# Altium PCB jfino-anchor.PcbDoc
Units mm, origin at the board's own origin, x right, y up, seen from the top; angles counter-clockwise.
Board outline 32.5 x 65.3 mm, 2 copper layers (Top Layer, Bottom Layer), stack 1.57 mm thick; 90 components, 72 nets, 274 pads, 173 vias.
Unrouted connection lines stored in the file: 100.
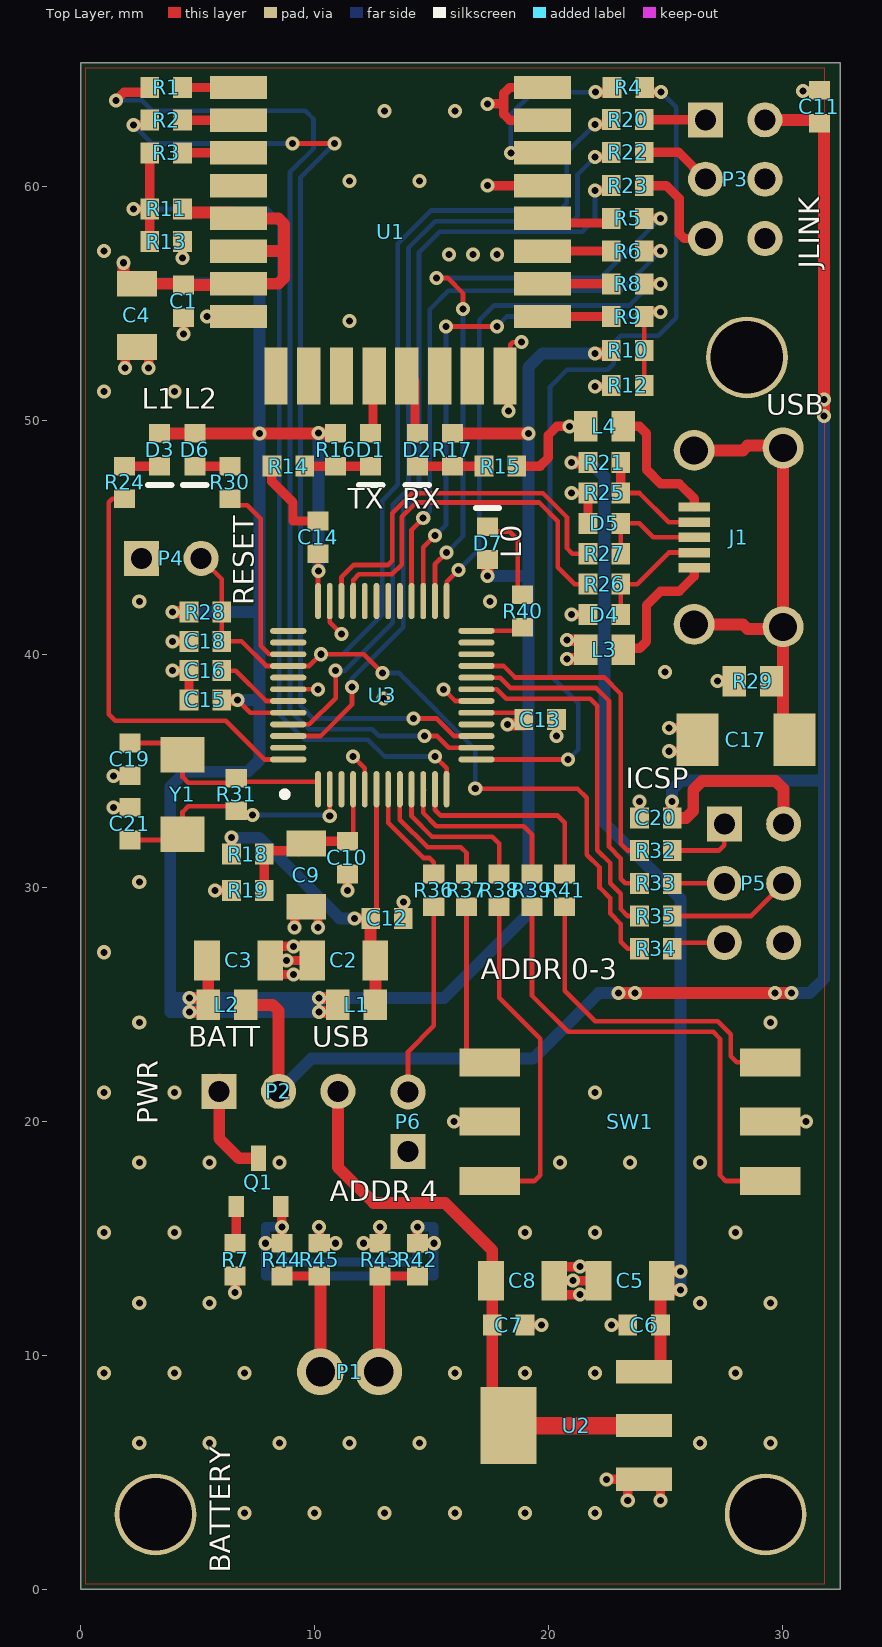
[diagram p0: Top Layer view]
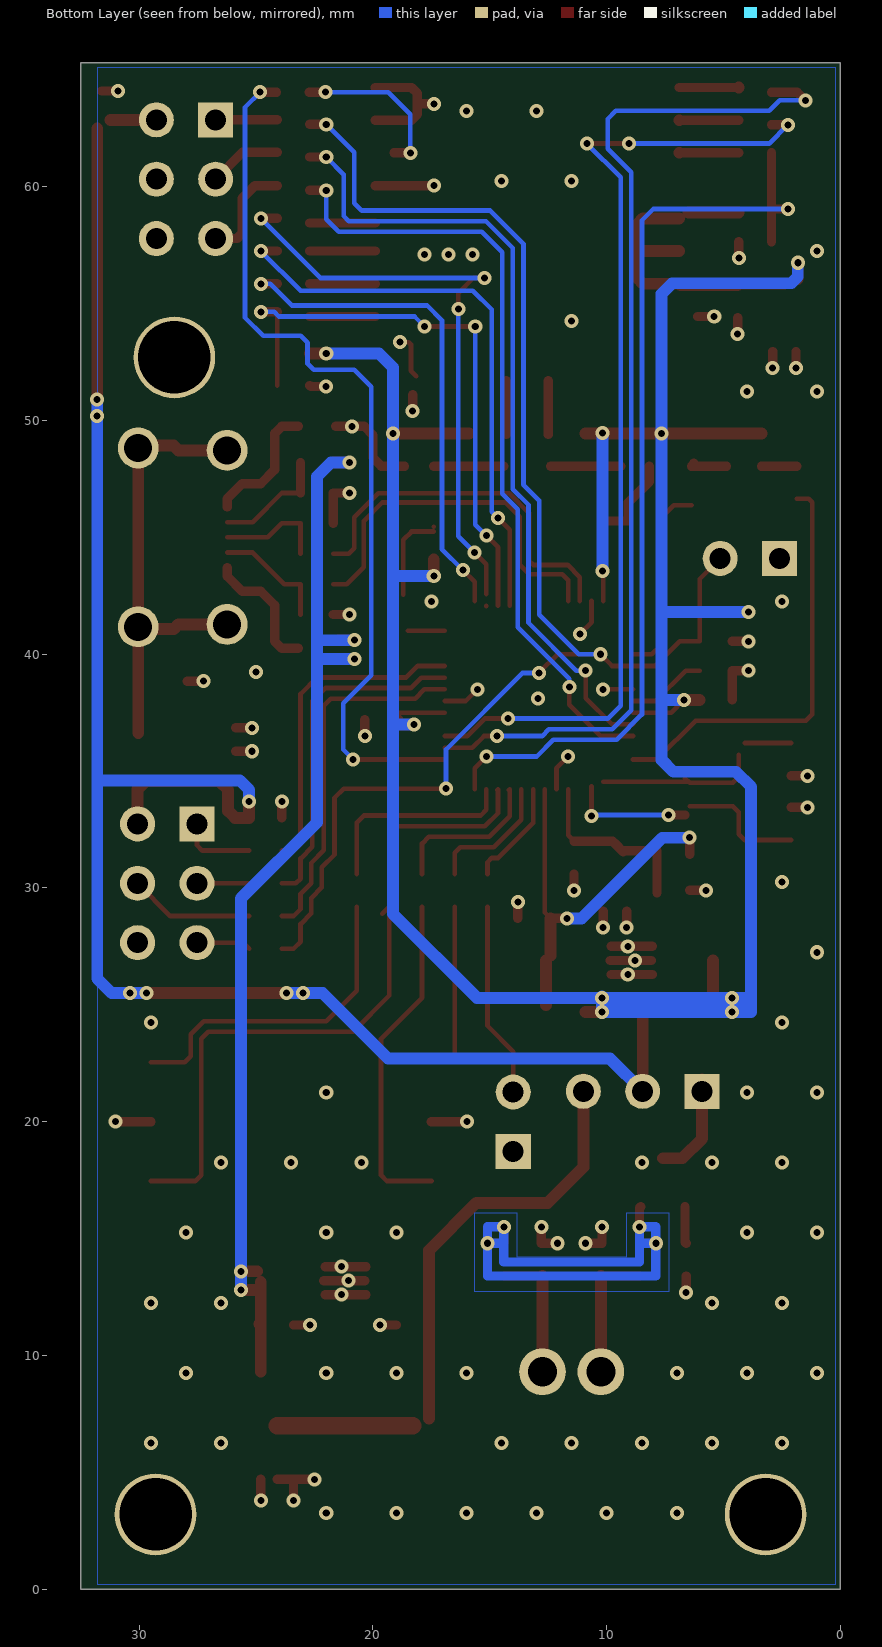
[diagram p1: Bottom Layer view, seen from below]
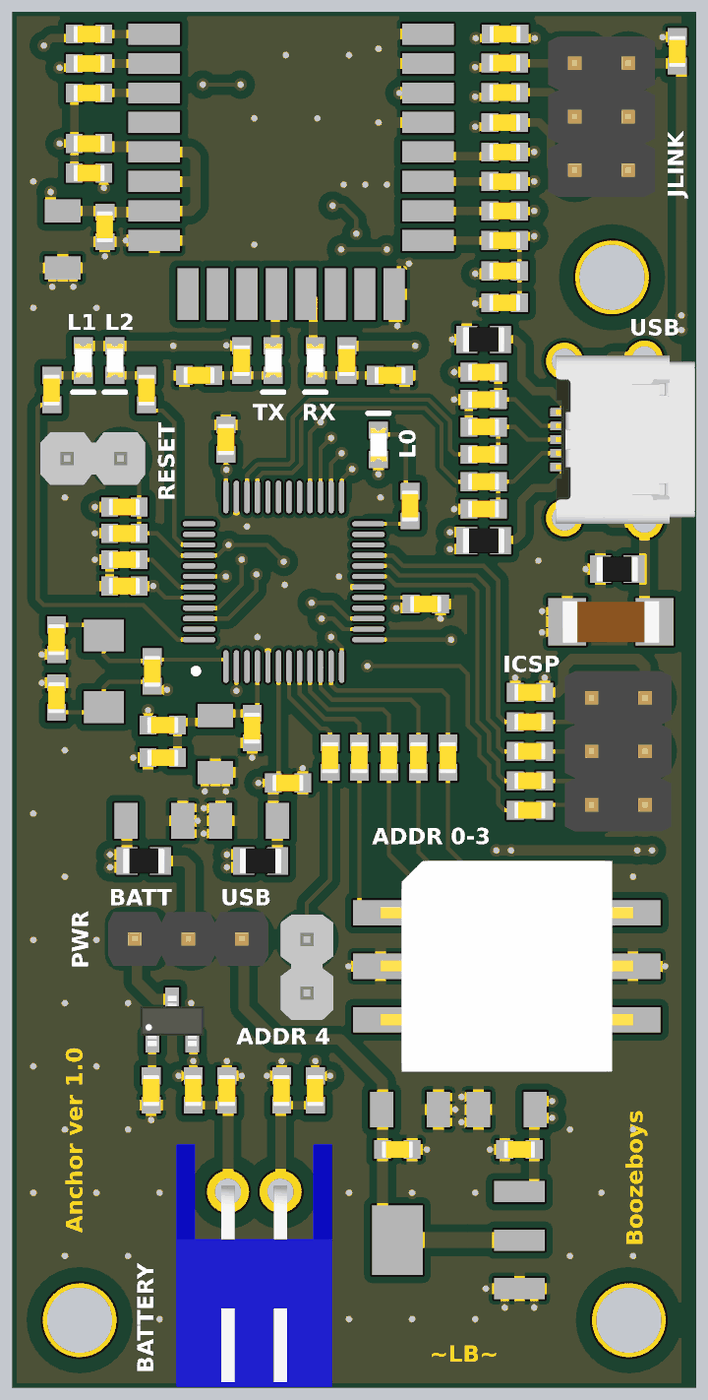
[diagram p2: 3D render of the assembled board from above, using the file's embedded part models]

## Layer stack, top to bottom
Top Solder: solder mask 0.01, Dk 0
Top Layer: signal copper 0.035
Core: core 1.5, Dk 0
Bottom Layer: signal copper 0.035
Bottom Solder: solder mask 0.01, Dk 0

## Board outline
0,65.3 32.5,65.3 32.5,0 0,0

## Design rules (kind name [scope] priority, off if disabled: settings)
Clearance Clearance_U3 [(ObjectKind = 'Pad') And (Component = 'U3')] p1: gap=0.24 ignorepadtopadclearanceinfootprint=FALSE
Clearance Clearance_J1 [(ObjectKind = 'Pad') And (Component = 'J1')] p2: gap=0.23 ignorepadtopadclearanceinfootprint=FALSE
Clearance Clearance_DIFF [InNetClass('USB')] p3: gap=0.2 ignorepadtopadclearanceinfootprint=FALSE
Clearance [All] p4: gap=0.254 ignorepadtopadclearanceinfootprint=FALSE except(0.381: Arc-Fill Arc-Poly Arc-Region Track-Fill Track-Poly Track-Region SMDPad-Fill SMDPad-Poly SMDPad-Region Via-Fill Via-Poly Via-Region Fill-Fill Fill-Poly Fill-Region Poly-Poly Poly-Region Region-Region; 0.762: THPad-Fill THPad-Poly THPad-Region)
DiffPairsRouting [InDifferentialPairClass('All Differential Pairs')] p1: maxlimit=0.2 minlimit=0.2 mostfreqgap=0.2 toplayer_minwidth=0.2 toplayer_maxwidth=0.2 toplayer_prefwidth=0.2 bottomlayer_minwidth=0.2 bottomlayer_maxwidth=0.2 bottomlayer_prefwidth=0.2 maxuncoupledlength=12.7
HoleSize [All] p1: absolutevalues=TRUE maxlimit=3.5 minlimit=0.025 maxpercent=80.000 minpercent=20.000
MatchedLengths MatchedLengths_usb1 [InDifferentialPair('usb1')] p1: tolerance=0.5 checknetsindiffpair=TRUE checkdiffpairvsdiffpair=FALSE checkxsignals=FALSE checkothers=FALSE
MatchedLengths MatchedLengths_usb2 [InDifferentialPair('usb2')] p2: tolerance=0.5 checknetsindiffpair=TRUE checkdiffpairvsdiffpair=FALSE checkxsignals=FALSE checkothers=FALSE
MinimumSolderMaskSliver [All] p1: minsoldermaskwidth=0.04
PolygonConnect PolygonConnect_via [IsVia] p1: connectstyle=Direct reliefconductorwidth=0.254 reliefentries=4 polygonreliefangle="90 Angle" airgapwidth=0.254
PolygonConnect [All] p2: connectstyle=Relief reliefconductorwidth=0.508 reliefentries=4 polygonreliefangle="90 Angle" airgapwidth=0.254
RoomDefinition jfino-anchor [InComponentClass('jfino-anchor')] p1: confinementstyle=ConfineIn formatcopy=TRUE lockcomponents=FALSE outline 101.25,-33.25 576.499,-33.25 576.499,-5.75 101.25,-5.75
RoutingVias [All] p1: holewidth=0.3 width=0.6 viastyle="Through Hole" minholewidth=0.3 minwidth=0.6 maxholewidth=0.3 maxwidth=0.6
SolderMaskExpansion [All] p1: expansion=0.102
Width [All] p1: maxlimit=1 minlimit=0.2 preferedwidth=0.508
27 further rules are at their usual default settings.

## Classes and differential pairs
net class USB: usb1_n usb1_p usb2_n usb2_p
differential pair usb1: +usb1_p -usb1_n
differential pair usb2: +usb2_p -usb2_n

## Components (designator, comment, footprint, x,y, rotation, side; value= is the part's Value field where it differs from the comment)
C1 "100nF" 0603_[1608] 4.4,55.1 r90 top value=10nF
C2 "10uF" 1206_[3216] 11.25,26.9 r0 top value=10nF
C3 "10uF" 1206_[3216] 6.75,26.9 r180 top value=10nF
C4 "10uF" 1206_[3216] 2.4,54.5 r90 top value=10nF
C5 "47uF" 1206_[3216] 23.5,13.2 r0 top value=10nF
C6 "100nF" 0603_[1608] 24.1,11.3 r0 top value=10nF
C7 "100nF" 0603_[1608] 18.3,11.3 r180 top value=10nF
C8 "47uF" 1206_[3216] 18.9,13.2 r180 top value=10nF
C9 "10uF" 1206_[3216] 9.65,30.55 r90 top value=10nF
C10 "100nF" 0603_[1608] 11.4,31.3 r90 top value=10nF
C11 "100nF" 0603_[1608] 31.6,63.425 r90 top value=10nF
C12 "100nF" 0603_[1608] 13.1,28.7 r180 top value=10nF
C13 "100nF" 0603_[1608] 19.65,37.2 r180 top value=10nF
C14 "100nF" 0603_[1608] 10.15,45 r270 top value=10nF
C15 "100nF" 0603_[1608] 5.325,38.05 r0 top value=10nF
C16 "100nF" 0603_[1608] 5.325,39.3 r0 top value=10nF
C17 "NP" 1808_[4520] 28.45,36.35 r0 top value=10nF
C18 "100nF" 0603_[1608] 5.325,40.55 r0 top value=10nF
C19 "6.8pF" 0603_[1608] 2.1,35.5 r270 top value=10nF
C20 "100nF" 0603_[1608] 24.6,33 r180 top value=10nF
C21 "6.8pF" 0603_[1608] 2.1,32.75 r90 top value=10nF
D1 "WB_TX" 0603_[1608]_K1-A2_LED 12.4,48.75 r270 top
D2 "WB_RX" 0603_[1608]_K1-A2_LED 14.4,48.75 r270 top
D3 "RX_LED" 0603_[1608]_K1-A2_LED 3.375,48.75 r270 top
D4 "CG0603MLC-05" 0603_[1608] 22.4,41.7 r180 top
D5 "CG0603MLC-05" 0603_[1608] 22.4,45.6 r180 top
D6 "TX_LED" 0603_[1608]_K1-A2_LED 4.875,48.75 r270 top
D7 "CPU_LED" 0603_[1608]_K1-A2_LED 17.4,44.75 r90 top
J1 "Mini USB Type B" USB_MICRO_B_SMD 28.75,45 r90 top
L1 "Inductor" 0805_[2012] 11.8,25 r180 top
L2 "Inductor" 0805_[2012] 6.25,25 r0 top
L3 "WE742792022" 0805_[2012] 22.4,40.2 r180 top
L4 "WE742792022" 0805_[2012] 22.4,49.75 r0 top
P1 "BATT_CONN" BATTERY_CONNECTOR_LIPO_THD 11.5,5.8 r0 top
P2 "BATT/USB" HEADER_1X3_2.54MM_THD 8.46,21.3 r0 top
P3 "JLINK" HEADER_2X3_2.54MM_THD 28,60.325 r270 top
P4 "RESET" HEADER_1X2_2.54MM_THD 3.875,44.1 r0 top
P5 "ICSP" HEADER_2X3_2.54MM_THD 28.8,30.2 r270 top
P6 "ADDR_H" HEADER_1X2_2.54MM_THD 14,20 r90 top
Q1 "IRLML6402" SOT-23 7.6,17.4 r90 top
R1 "33R" 0603_[1608] 3.65,64.25 r0 top value=1K
R2 "33R" 0603_[1608] 3.65,62.85 r0 top value=1K
R3 "33R" 0603_[1608] 3.65,61.45 r0 top value=1K
R4 "33R" 0603_[1608] 23.425,64.25 r0 top value=1K
R5 "33R" 0603_[1608] 23.4,58.65 r0 top value=1K
R6 "33R" 0603_[1608] 23.4,57.25 r0 top value=1K
R7 "1k" 0603_[1608] 6.6,14.1 r270 top value=1K
R8 "33R" 0603_[1608] 23.4,55.85 r0 top value=1K
R9 "33R" 0603_[1608] 23.4,54.45 r0 top value=1K
R10 "47k" 0603_[1608] 23.4,53 r180 top value=1K
R11 "NP" 0603_[1608] 3.65,59.05 r0 top value=1K
R12 "NP" 0603_[1608] 23.4,51.5 r180 top value=1K
R13 "47k" 0603_[1608] 3.65,57.65 r0 top value=1K
R14 "1k" 0603_[1608] 8.875,48.05 r0 top value=1K
R15 "1k" 0603_[1608] 17.95,48.05 r180 top value=1K
R16 "NP" 0603_[1608] 10.9,48.75 r270 top value=1K
R17 "NP" 0603_[1608] 15.9,48.75 r270 top value=1K
R18 "NP" 0603_[1608] 7.15,31.45 r180 top value=1K
R19 "NP" 0603_[1608] 7.15,29.9 r0 top value=1K
R20 "33R" 0603_[1608] 23.4,62.875 r0 top value=1K
R21 "NP" 0603_[1608] 22.4,48.2 r180 top value=1K
R22 "33R" 0603_[1608] 23.4,61.475 r0 top value=1K
R23 "33R" 0603_[1608] 23.4,60.05 r0 top value=1K
R24 "470R" 0603_[1608] 1.875,47.35 r90 top value=1K
R25 "NP" 0603_[1608] 22.4,46.9 r0 top value=1K
R26 "33R" 0603_[1608] 22.4,43 r180 top value=1K
R27 "33R" 0603_[1608] 22.4,44.3 r180 top value=1K
R28 "47k" 0603_[1608] 5.325,41.8 r180 top value=1K
R29 "NP" 0805_[2012] 28.75,38.85 r180 top value=1K
R30 "470R" 0603_[1608] 6.375,47.35 r90 top value=1K
R31 "NP" 0603_[1608] 6.65,34 r270 top value=1K
R32 "33R" 0603_[1608] 24.6,31.6 r0 top value=1K
R33 "33R" 0603_[1608] 24.6,30.2 r0 top value=1K
R34 "33R" 0603_[1608] 24.6,27.4 r0 top value=1K
R35 "33R" 0603_[1608] 24.6,28.8 r180 top value=1K
R36 "33R" 0603_[1608] 15.1,29.9 r90 top value=1K
R37 "33R" 0603_[1608] 16.5,29.9 r90 top value=1K
R38 "33R" 0603_[1608] 17.9,29.9 r90 top value=1K
R39 "33R" 0603_[1608] 19.3,29.9 r90 top value=1K
R40 "470R" 0603_[1608] 18.9,41.85 r90 top value=1K
R41 "33R" 0603_[1608] 20.7,29.9 r90 top value=1K
R42 "NP" 0603_[1608] 14.4,14.1 r90 top value=1K
R43 "NP" 0603_[1608] 12.8,14.1 r90 top value=1K
R44 "NP" 0603_[1608] 8.6,14.1 r90 top value=1K
R45 "NP" 0603_[1608] 10.2,14.1 r90 top value=1K
SW1 "ADDRESS_SW" rotary_switch 23.5,20 r270 top
U1 "DW1000" DWM1000 6.75,51.9 r0 top
U2 "LM1117-3V3" SOT-223 21.2,7 r180 top
U3 "SAMD21G" LQFP-48_7x7MM_0.5MM 12.9,38.25 r90 top
Y1 "32.768kHz-SMD" CRYSTAL_4X1.5MM_2P_SMD 4.35,34 r90 top

## Footprints (in the part's own frame and the unit in brackets; to place one, negate y for a bottom-side part, rotate by r counter-clockwise, add the part's x,y. Pads: shape width x height; smd on the part's side, far side on the other; paste and mask are expansions set on the pad)
0603_[1608] [mm] "Chip Capacitor, Body 1.6x0.8mm, IPC High Density"
  rect 0.8x0.9 smd: 1(-0.7,0) 2(0.7,0)
  body extent -0.75,-0.4 0.75,0.4, height 0.67
0603_[1608]_K1-A2_LED [mm] "SMD led 0603 size"
  rect 0.8x0.9 smd: 1(0.7,0) 2(-0.7,0)
  silkscreen extent 1.5,-0.5 1.5,0.5, body extent -0.8,-0.4 0.8,0.4, height 0.7
0805_[2012] [mm] "Chip Resistor, Body 2.0x1.2mm, IPC High Density"
  rect 1x1.3 smd: 1(-0.8,0) 2(0.8,0)
  body extent -1,-0.6 1,0.6, height 0.62
1206_[3216] [mm] "Chip Capacitor, Body 3.2x1.6mm, IPC High Density"
  rect 1.1x1.7 smd: 1(-1.35,0) 2(1.35,0)
  body extent -1.7,-0.9 1.7,0.9, height 1.3
1808_[4520] [mm] "Chip Capacitor; Body 4.5 x 2.0 mm (LxW typ)"
  rect 1.8x2.25 smd: 1(-2.075,0) 2(2.075,0)
  body extent -2.3,-1 2.3,1, height 1.35
BATTERY_CONNECTOR_LIPO_THD [mm]
  round 2 hole 1.25: 1(-1.25,3.5) 2(1.25,3.5)
  body extent -3.7,-5.75 3.7,5.75, height 5.95
CRYSTAL_4X1.5MM_2P_SMD [mm] "smd crystall"
  rect 1.5x1.9 smd: 1(-1.7,0) 2(1.7,0)
  body extent -2.05,-0.75 2.05,0.75, height 1
DWM1000 [mm]
  rect 2.45x1 smd: 1(0,12.35) 2(0,10.95) 3(0,9.55) 4(0,8.15) 5(0,6.75) 6(0,5.35) 7(0,3.95) 8(0,2.55) 17(13,2.55) 18(13,3.95) 19(13,5.35) 20(13,6.75) 21(13,8.15) 22(13,9.55) 23(13,10.95) 24(13,12.35)
  rect 1x2.45 smd: 9(1.6,0) 10(3,0) 11(4.4,0) 12(5.8,0) 13(7.2,0) 14(8.6,0) 15(10,0) 16(11.4,0)
  body extent 0,0 13,23, height 1
HEADER_1X2_2.54MM_THD [mm] "Connector; Header; 2 Position"
  rect 1.5x1.5 hole 0.9: 1(-1.27,0)
  round 1.5 hole 0.9: 2(1.27,0)
  body extent -2.54,-1.25 2.44,1.25, height 8.2
HEADER_1X3_2.54MM_THD [mm] "pin header 2.54mm 1row 3pin"
  rect 1.5x1.5 hole 0.9: 1(-2.54,0)
  round 1.5 hole 0.9: 2(0,0) 3(2.54,0)
  body extent -3.91,-1.27 3.71,1.27, height 8.67
HEADER_2X3_2.54MM_THD [mm] "pin header 2.54mm 2row 6pin"
  rect 1.5x1.5 hole 0.9: 1(-2.54,-1.27)
  round 1.5 hole 0.9: 2(-2.54,1.27) 3(0,-1.27) 4(0,1.27) 5(2.54,-1.27) 6(2.54,1.27)
  body extent -3.81,-2.54 3.81,2.54, height 8.54
LQFP-48_7x7MM_0.5MM [mm] "Thin QFP, 48-Leads, Body 7x7mm, Pitch 0.5mm, IPC High Density"
  oval 1.55x0.25 smd: 1(-4.025,2.75) 2(-4.025,2.25) 3(-4.025,1.75) 4(-4.025,1.25) 5(-4.025,0.75) 6(-4.025,0.25) 7(-4.025,-0.25) 8(-4.025,-0.75) 9(-4.025,-1.25) 10(-4.025,-1.75) 11(-4.025,-2.25) 12(-4.025,-2.75) 25(4.025,-2.75) 26(4.025,-2.25) 27(4.025,-1.75) 28(4.025,-1.25) 29(4.025,-0.75) 30(4.025,-0.25) 31(4.025,0.25) 32(4.025,0.75) 33(4.025,1.25) 34(4.025,1.75) 35(4.025,2.25) 36(4.025,2.75)
  oval 0.25x1.55 smd: 13(-2.75,-4.025) 14(-2.25,-4.025) 15(-1.75,-4.025) 16(-1.25,-4.025) 17(-0.75,-4.025) 18(-0.25,-4.025) 19(0.25,-4.025) 20(0.75,-4.025) 21(1.25,-4.025) 22(1.75,-4.025) 23(2.25,-4.025) 24(2.75,-4.025) 37(2.75,4.025) 38(2.25,4.025) 39(1.75,4.025) 40(1.25,4.025) 41(0.75,4.025) 42(0.25,4.025) 43(-0.25,4.025) 44(-0.75,4.025) 45(-1.25,4.025) 46(-1.75,4.025) 47(-2.25,4.025) 48(-2.75,4.025)
  silkscreen extent -4.36,4.05 -4.12,4.3, body extent -3.5,-3.5 3.5,3.5, height 1.45
rotary_switch [mm] "SMD Rotary Switch 10x10mm 2.54mm"
  rect 1.2x2.6 smd: 1(-2.54,-6) 2(2.54,6) 4(2.54,-6) 8(-2.54,6) C1(0,-6) C2(0,6)
  body extent -5,-6 5,6, height 6.77
SOT-23 [mm] "SOT23, 3-Leads, Body 2.9x1.3mm, Pitch 0.95mm, Lead Span 2.5mm, IPC High Density"
  rect 0.9x0.65 smd: 1(-1.038,0.95) 2(-1.038,-0.95)
  rect 1.1x0.65 smd: 3(1.038,0)
  body extent -1.2,-1.52 1.2,1.52, height 1.22
SOT-223 [mm] "SOT223, 4-Leads, Body 6.5x3.5mm, Pitch 2.3mm, Lead Span 7mm, IPC Medium Density"
  rect 2.4x1 smd: 1(-2.9,2.3) 2(-2.9,0) 3(-2.9,-2.3)
  rect 2.4x3.3 smd: 4(2.9,0)
  body extent -1.85,-3.35 1.85,3.35, height 1.8
USB_MICRO_B_SMD [mm] "Micro USB 2.0 Type B Horizontal"
  rect 0.4x1.35 smd: 1(-1.3,2.51) 2(-0.65,2.51) 3(0,2.51) 4(0.65,2.51) 5(1.3,2.51)
  round 1.75 hole 1.2: Z1(-3.725,2.51) Z2(3.725,2.51) Z3(-3.825,-1.295) Z4(3.825,-1.295)
  body extent -4,-3.69 4,2.92, height 2.82

## Part data
C1 C2 C3 C4 C5 C6 C7 C8 C9 C10 C11 C12 C13 C14 C15 C16 C17 C18 C19 C20 C21: library part Cap, "Capacitor", Published=8-Jun-2000, Publisher="Altium Limited", Revision="July-2002: Re-released for DXP Platform."
D1 D2 D3 D6 D7: library part LED, "Multicolor LED"
D4 D5: library part TVS
J1: library part USB_Con_Type_B_mini_SMT, "Mini USB SMT Type B 5 Contacts", Manufacturer="Würth Elektronik eiSos GmbH", partNo=65100516121, ComponentLink1 Description=Manufacturer, ComponentLink1URL=http://www.we-online.de, ComponentLink2 Description=Datasheet, ComponentLink2URL=http://katalog.we-online.de/em/datasheet/65100516121.pdf, Created by="Karrer Zheng", Created Date=10/10/2014, NoPins=5
L1 L2: "Ferrite (WE 742792022)"
L3 L4: library part Inductor, "Ferrite (WE 742792022)"
P1 P4 P6: library part "Header 2", "Header, 2-Pin", LatestRevisionDate=17-Jul-2002, LatestRevisionNote="Re-released for DXP Platform.", Publisher="Altium Limited"
P2: library part "Header 3", "Header, 3-Pin", LatestRevisionDate=17-Jul-2002, LatestRevisionNote="Re-released for DXP Platform.", Publisher="Altium Limited"
P3 P5: library part "Header 3X2", "Header, 3-Pin, Dual row", LatestRevisionDate=17-Jul-2002, LatestRevisionNote="Re-released for DXP Platform.", Publisher="Altium Limited"
Q1: library part "MOSFET-P 3pin", "MOSFET P"
R1 R2 R3 R4 R5 R6 R7 R8 R9 R10 R11 R12 R13 R14 R15 R16 R17 R18 R19 R20 R21 R22 R23 R24 R25 R26 R27 R28 R29 R30 R31 R32 R33 R34 R35 R36 R37 R38 R39 R40 R41 R42 R43 R44 R45: library part Res1, "Resistor", Published=8-Jun-2000, Publisher="Altium Limited", Revision="July-2002: Re-released for DXP Platform."
SW1: library part "Rotary Switch HEX", "SMD Rotary HEX Switch 10x10mm 2.54mm", PartNumber=428521320810, ComponentLink1Description="Manufacturer URL", ComponentLink1URL=http://www.we-online.com, ComponentLink2Description=Datasheet, ComponentLink2URL=http://katalog.we-online.de/em/datasheet/428521320810.pdf, NoPins=06, PackageReference=428521320810
U2: library part LM1117-FIXED-OUT, "LM1117 LDO Fixed output"
Y1: "Crystal 32.768kHz SMD 2-Pin", Part Number="Aker C2E-24.000-12-3030-X", Purchase Code="RS 671-9564"

## Free pads (board coordinates)
  round 3.5 hole 3.1: 2(3.2,3.2) 2(28.5,52.7) 2(29.3,3.2)

## Via types
v1: diameter 0.6, hole 0.3, Top Layer to Bottom Layer, tented both sides, 173 vias

## Nets (pads, with @x,y where several pads share a name; then routed paths per layer and width w, separated by ;. In a path a pad name is that pad's centre, name@x,y a point inside that pad or via, vN(x,y) a via of type N, cw(c..) or ccw(c..) an arc to the next point about the centre after c; other vN are vias at no path point)
+3V3: C11.1 C20.1 L2.2 P2.2 P3.2 P5.2 | length 86.2
  Top Layer w0.508: L2.2 8.2,25 8.46,24.74 P2.2 ; v1(23,25.5) v1(23.7,25.5) v1(29.7,25.5) v1(30.4,25.5) ; v1(25.3,33.7) C20.1 25.9,33 26.2,33.3 26.2,34.2 26.575,34.575 29.725,34.575 30.07,34.23 P5.2 ; P3.2 C11.1@31.235,62.865 ; v1(31.8,50.2) v1(31.8,50.9) C11.1@31.8,62.5
  Bottom Layer w0.508: P2.2 9.86,22.7 19.35,22.7 22.15,25.5 v1(23,25.5) v1(23.7,25.5) ; v1(25.3,33.7) 25.3,34.2 25.7,34.6 31.8,34.6 ; v1(29.7,25.5) v1(30.4,25.5) 31.175,25.5 31.8,26.125 31.8,34.6 ; v1(31.8,50.9) v1(31.8,50.2) 31.8,34.6
+3V3_A: C2.2 C12.2 L1.1 R18.2 U3.6 | length 17.3
  Top Layer w0.2: C12.2@12.4,28.5 C12.2@12.45,28.55 ; C12.2 12.65,28.95 U3.6
  Top Layer w0.4: R18.2 v1(6.45,32.15) ; v1(11.7,28.7) C12.2
  Top Layer w0.508: C2.2@12.4,27.1 12.4,28.5 C12.2 ; L1.1 C2.2
  Bottom Layer w0.508: v1(6.45,32.15) 7.625,32.15 11.075,28.7 v1(11.7,28.7)
+3V3_D: C1.2 C3.2 C4.2 C13.2 C14.2 C15.2 D3.2 D6.2 D7.2 L1.2 L2.1 R10.2 R11.2 R16.1 R17.1 R28.2 U1.5 U1.6 U1.7 U3.17 U3.36 U3.44 | length 151.4
  Top Layer w0.2: v1(6.696,38.05) 7.246,37.5 U3.44 ; U3.36 C14.2 ; U3.17 C13.2@18.95,37.5
  Top Layer w0.508: C4.2@1.825,56.05 v1(1.825,56.75) ; C4.2 4.35,55.85 C1.2 6.85,55.8 6.9,55.85 8.45,55.85 8.7,56.1 8.7,57.25 ; D3.2 D6.2 v1(7.65,49.45) R16.1 ; v1(3.925,41.8) R28.2 ; R11.2@4.35,58.896 U1.5@6.504,58.896 ; v1(4.65,24.7) L2.1@5.35,24.7 ; v1(4.65,25.3) L2.1@5.35,25.3 ; L2.1 C3.2@5.45,26.9 ; C15.2 v1(6.696,38.05) ; U1.6@6.9,57.25 8.7,57.25 ; U1.5@6.9,58.65 8.45,58.65 8.7,58.4 8.7,57.25 ; v1(10.2,24.7) L1.2@10.9,24.7 ; v1(10.2,25.3) L1.2@10.9,25.3 ; R17.1 v1(19.15,49.45) ; v1(17.4,43.35) D7.2 ; v1(18.25,37) C13.2@18.95,37 ; v1(22,52.875) R10.2@22.7,52.875
  Bottom Layer w0.508: v1(1.825,56.75) 1.825,56.15 2.1,55.875 7.2,55.875 7.65,55.425 v1(7.65,49.45) 7.65,41.8 ; v1(3.925,41.8) 7.65,41.8 ; v1(6.696,38.05) 7.625,38.05 7.65,38.075 ; v1@10.15,43.541 v1(10.175,43.566) v1(10.175,49.475) ; v1(17.4,43.35) 19.05,43.35 19.15,43.45 ; v1(18.25,37) 19.15,37 ; v1(22,52.875) 19.75,52.875 19.15,52.275 v1(19.15,49.45) 19.15,43.45 ; 3.825,25 3.825,24.7 v1(4.65,24.7) v1(10.2,24.7) v1(10.2,25.3) ; 3.825,25 3.825,25.3 ; 3.825,25 9.9,25 v1(10.2,25.3) ; 3.825,25.3 v1(4.65,25.3) v1(10.2,25.3) ; 3.825,25.3 3.825,34.325 4.475,34.975 7.15,34.975 7.65,35.475 7.65,36.85 7.65,38.075 ; 7.65,38.075 7.65,41.8 ; v1(10.2,25.3) 15.55,25.3 19.15,28.9 19.15,37 ; 19.15,37 19.15,43.45
+5V: C5.2 C6.2 L3.2 R21.2 U2.3 | length 48.4
  Top Layer w0.508: v1(20.8,39.8) L3.2@21.5,39.8 ; v1(20.8,40.6) L3.2@21.5,40.6 ; v1(21,48.2) R21.2 ; U2.3@24.8,9.3 C6.2 ; C5.2@24.8,13.15 C6.2 ; C6.2@24.85,11.35 C6.2 ; C5.2@24.95,12.8 v1(25.65,12.8) ; C5.2@24.95,13.6 v1(25.65,13.6)
  Bottom Layer w0.508: v1(20.8,39.8) 22.4,39.8 ; v1(20.8,40.6) 22.4,40.6 ; v1(21,48.2) 21.8,48.2 22.4,47.6 22.4,40.6 ; v1(25.65,12.8) v1(25.65,13.6) 25.65,29.55 22.4,32.8 22.4,39.8 ; 22.4,39.8 22.4,40.6
GND: C1.1 C2.1 C3.1 C4.1 C5.1 C6.1 C7.1 C8.1 C9.1 C10.1 C11.2 C12.1 C13.1 C14.1 C15.1 C16.1 C17.1 C18.1 C19.2 C20.2 C21.2 D4.2 D5.2 L4.1 P3.4 P3.6 P4.1 P5.6 P6.1 R7.2 R12.2 R13.2 R14.1 R15.1 R19.1 R25.1 R29.2 R43.2 R45.2 SW1.C1 SW1.C2 U1.8 U1.16 U1.21 U1.23 U1.24 U2.1 U3.5 U3.18 U3.35 U3.42 | length 65.2
  Top Layer w0.2: U3.42 v1(10.15,38.5) ; U3.35 10.65,41.375 v1(11.15,40.875) ; v1(11.65,35.625) 12.15,35.125 U3.5 ; v1(15.525,38.5) 16.025,38 U3.18 ; U1.16 18.376,52.126 18.376,53.25 18.476,53.35 v1(18.85,53.35)
  Top Layer w0.4: v1(1.4,33.45) C21.2 ; v1(1.4,34.8) C19.2 ; v1(1.9,52.25) C4.1@1.9,52.95 ; v1(2.9,52.25) C4.1@2.9,52.95 ; v1(3.925,39.3) C16.1 C15.1 ; v1(3.925,40.55) C18.1 ; v1(4.35,56.95) R13.2 ; v1(4.4,53.7) C1.1 ; v1(5.4,54.45) U1.8@6.1,54.45 ; v1(5.75,29.9) R19.1 ; v1(6.6,12.7) R7.2 ; C3.1@8.05,26.3 v1(9.1,26.3) C2.1@9.8,26.3 ; C3.1@8.05,27.5 v1(9.1,27.5) C2.1@9.8,27.5 ; C3.1 v1(8.8,26.9) C2.1@9.85,26.9 ; R14.1 8.175,47.393 9.075,46.492 9.075,45.7 C14.1 ; v1(9.15,28.3) C9.1@9.15,29 ; v1(10.15,28.3) C9.1@10.15,29 ; v1(10.2,15.5) R45.2 v1(10.9,14.8) ; v1(11.4,29.9) C10.1 ; v1(12.1,14.8) R43.2 v1(12.8,15.5) ; C12.1 v1(13.8,29.4) ; v1(15.975,20) SW1.C1 ; v1(17.4,60.05) U1.21 U1.21@19.9,60.05 ; v1(17.4,63.55) 18.1,63.55 ; v1(18.3,50.4) U1.16@18.3,51.1 ; R15.1 19.65,48.05 20,48.4 20,49.375 20.375,49.75 v1(20.9,49.75) L4.1 ; C7.1 v1(19.7,11.3) ; U1.23@19.9,62.85 U1.23 18.35,62.85 18.1,63.1 18.1,63.55 ; U1.24@19.9,64.25 U1.24 18.35,64.25 18.1,64 18.1,63.55 ; C8.1@20.3,12.6 v1(21.35,12.6) C5.1@22.05,12.6 ; C8.1@20.3,13.8 v1(21.35,13.8) C5.1@22.05,13.8 ; C8.1@20.35,13.2 v1(21.05,13.2) C5.1@22.1,13.2 ; v1(20.35,36.5) C13.1 ; v1(21,41.7) D4.2 ; v1(21,46.9) R25.1 D5.2 ; v1(22.001,51.453) 22.652,51.453 R12.2 ; v1(22.5,4.7) U2.1@23.4,4.7 ; v1(22.7,11.3) C6.1 ; v1(23.4,3.8) U2.1@23.4,4.7 ; C20.2 v1(23.9,33.7) ; U2.1 U2.1@23.4,4.7 ; v1(24.8,3.8) U2.1@24.8,4.7 ; v1(25.175,35.85) C17.1@25.875,35.85 ; v1(25.175,36.85) C17.1@25.875,36.85 ; v1(27.25,38.85) R29.2 ; SW1.C2 v1(31.025,20) ; v1(30.9,64.1) C11.2@31.6,64.1
  other v1: 7,3.25 10,3.25 13,3.25 16,3.25 19,3.25 22,3.25 2.5,6.25 5.5,6.25 8.5,6.25 11.5,6.25 14.5,6.25 26.5,6.25 29.5,6.25 1,9.25 4,9.25 7,9.25 16,9.25 19,9.25 22,9.25 28,9.25 2.5,12.25 5.5,12.25 26.5,12.25 29.5,12.25 1,15.25 4,15.25 19,15.25 22,15.25 28,15.25 2.5,18.25 5.5,18.25 8.5,18.25 20.5,18.25 23.5,18.25 26.5,18.25 1,21.25 4,21.25 22,21.25 2.5,24.25 29.5,24.25 1,27.25 2.5,30.25 12.95,38.099 25,39.25 2.5,42.25 17.5,42.25 1,51.25 4,51.25 11.5,54.25 15.75,57.1 16.775,57.1 17.8,57.1 1,57.25 11.5,60.25 14.5,60.25 13,63.25 16,63.25
NetC7_2: C7.2 C8.2 P2.3 U2.2 U2.4 | length 24.8
  Top Layer w0.508: P2.3@11,21.8 P2.3 11,18.05 12.525,16.525 15.575,16.525 17.6,14.5 C7.2 U2.4@17.6,7.3
  Top Layer w0.75: U2.4 U2.2
NetC9_2: C9.2 C10.2 R18.1 R19.2 U3.4 | length 7.8
  Top Layer w0.2: C10.2 11.65,32.25 U3.4
  Top Layer w0.4: R19.2@7.85,29.8 R19.2 R18.1@7.85,31.55 ; R18.1@7.85,31.6 C9.2@9.3,31.6 ; C9.2@9.3,31.55 C9.2 9.75,32 C10.2
NetC16_2: C16.2 U3.43 | length 3.4
  Top Layer w0.2: C16.2 6.625,39.3 7.925,38 U3.43
NetC17_2: C17.2 J1.Z1 J1.Z2 J1.Z3 J1.Z4 R29.1 | length 20.3
  Top Layer w0.508: J1.Z1@26.14,41.275 J1.Z1 28.325,41.275 28.525,41.075 J1.Z3@30.045,41.075 ; J1.Z2@26.14,48.725 J1.Z2 28.325,48.725 28.525,48.925 30.045,48.925 J1.Z4 J1.Z3@30.045,41.075 ; C17.2@30.045,36.63 J1.Z3@30.045,41.075
NetC18_2: C18.2 P4.2 R20.1 R28.1 R34.1 U3.40 | length 63.7
  Top Layer w0.2: P4.2 6.025,43.22 R28.1@6.025,41.5 ; R28.1 6.025,40.55 6.875,40.55 7.925,39.5 U3.40 9.775,39.5 v1(10.275,40) 12.1,40 v1(12.9,39.2) ; v1(16.875,34.25) 21.25,34.25 21.646,33.854 21.646,31.428 22.192,30.882 22.192,30.024 22.646,29.57 22.646,28.912 23.1,28.458 23.1,27.7 23.4,27.4 R34.1@23.9,27.4
  Top Layer w0.4: v1(22,62.675) R20.1@22.7,62.675
  Bottom Layer w0.2: v1(10.275,40) 11.2,40 12.892,41.692 12.892,46.576 13.563,47.247 13.563,57.569 14.977,58.983 20.483,58.983 20.796,59.296 20.796,61.471 v1(22,62.675) ; v1(12.9,39.2) 13.6,39.2 16.875,35.925 v1(16.875,34.25)
NetC19_1: C19.1 R31.1 U3.1 Y1.2 | length 9.1
  Top Layer w0.2: C19.1 Y1.2@4.1,36.2 ; Y1.2 4.35,34.75 4.6,34.5 6.45,34.5 R31.1 ; R31.1@6.5,34.55 U3.1@10.15,34.55
NetC21_1: C21.1 R31.2 U3.2 Y1.1 | length 10.8
  Top Layer w0.2: C21.1 4.1,32.05 Y1.1 4.35,33.25 4.6,33.5 R31.2@6.45,33.5 ; v1(10.65,33.075) U3.2 U3.2@10.65,34.35
  Top Layer w0.4: R31.2@6.65,33.125 v1(7.35,33.125)
  Bottom Layer w0.2: v1(7.35,33.125) 10.6,33.125 v1(10.65,33.075)
NetD1_1: D1.1 R14.2 R16.2 | length 3
  Top Layer w0.4: R14.2@9.4,48.05 R14.2 R16.2 D1.1
NetD1_2: D1.2 U1.12 | length 2.3
  Top Layer w0.4: D1.2@12.5,49.4 U1.12@12.5,51.7
NetD2_1: D2.1 R15.2 R17.2 | length 3
  Top Layer w0.4: D2.1 R15.2 R15.2@17.4,48.05
NetD2_2: D2.2 U1.13 | length 2.3
  Top Layer w0.4: D2.2@14.3,49.4 U1.13@14.3,51.7
NetD3_1: D3.1 R24.2 | length 1.5
  Top Layer w0.4: R24.2 D3.1
NetD6_1: D6.1 R30.2 | length 1.5
  Top Layer w0.4: D6.1 R30.2
NetD7_1: D7.1 R40.2 | length 3.8
  Top Layer w0.2: D7.1@17.4,45.25 18.35,45.25 18.7,44.9 R40.2@18.7,42.55
NetJ1_1: J1.1 L3.1 | length 5.6
  Top Layer w0.4: L3.1@23.2,40.25 23.9,40.25 24.2,40.55 24.2,42.1 24.8,42.7 25.6,42.7 26.24,43.34 J1.1
NetJ1_4: J1.4 R21.1 R25.2 | length 5
  Top Layer w0.2: R25.2 23.9,46.9 25.15,45.65 J1.4
  Top Layer w0.4: R25.2@23.1,46.9 R21.1
NetJ1_5: J1.5 L4.2 | length 5.6
  Top Layer w0.4: L4.2 23.9,49.75 24.2,49.45 24.2,47.9 24.8,47.3 25.6,47.3 26.24,46.66 J1.5
NetP1_1: P1.1 R44.1 R45.1 | length 5.7
  Top Layer w0.4: R44.1 R45.1
  Top Layer w0.508: P1.1 R45.1@10.25,13.4
NetP1_2: P1.2 R42.1 R43.1 | length 5.7
  Top Layer w0.4: R43.1 R42.1
  Top Layer w0.508: P1.2 R43.1@12.75,13.4
NetP2_1: P2.1 Q1.3 | length 4.5
  Top Layer w0.508: P2.1@5.92,21.8 P2.1 5.92,19.28 6.762,18.438 Q1.3
NetP3_1: P3.1 R20.2 | length 2.6
  Top Layer w0.4: R20.2 24.11,62.865 P3.1
NetP3_3: P3.3 R22.2 | length 3.1
  Top Layer w0.4: R22.2 25.58,61.475 P3.3
NetP3_5: P3.5 R23.2 | length 4.4
  Top Layer w0.4: R23.2 25.05,60.05 25.6,59.5 25.6,58 25.815,57.785 P3.5
NetP5_1: P5.1 R32.2 | length 3.2
  Top Layer w0.2: R32.2 27.3,31.6 27.53,31.83 P5.1
NetP5_3: P5.3 R33.2 | length 2.2
  Top Layer w0.2: R33.2 P5.3
NetP5_4: P5.4 R35.1 | length 5.4
  Top Layer w0.2: R35.1 28.67,28.8 P5.4
NetP5_5: P5.5 R34.2 | length 2.3
  Top Layer w0.2: R34.2 25.56,27.66 P5.5
NetP6_2: P6.2 R36.1 | length 8.4
  Top Layer w0.2: P6.2 14,23 15.1,24.1 R36.1
NetQ1_1: Q1.1 R7.1 | length 1.6
  Top Layer w0.4: R7.1 6.65,14.85 Q1.1
NetQ1_2: Q1.2 R42.2 R44.2 | length 26.7
  Top Layer w0.4: v1(7.9,14.8) R44.2 v1(8.6,15.5) 8.6,16.312 Q1.2 ; v1(14.4,15.5) R42.2 v1(15.1,14.8)
  Bottom Layer w0.4: 7.9,15.5 v1(7.9,14.8) ; 7.9,15.5 v1(8.6,15.5) 8.6,14.8 ; v1(7.9,14.8) 7.9,13.4 15.1,13.4 v1(15.1,14.8) ; v1(7.9,14.8) 8.6,14.8 8.6,14 14.4,14 14.4,14.8 ; 14.4,14.8 v1(14.4,15.5) 15.1,15.5 v1(15.1,14.8) ; 14.4,14.8 v1(15.1,14.8)
NetR1_1: R1.1 U3.14 | length 44.7
  Top Layer w0.2: v1(14.7,36.5) 15.25,36.5 15.75,36 U3.14
  Top Layer w0.4: v1(1.5,63.7) 1.85,64.05 R1.1@2.95,64.05
  Bottom Layer w0.2: v1(1.5,63.7) 2.6,63.7 3.05,63.25 9.604,63.25 9.954,62.9 9.954,61.625 8.946,60.617 8.946,37.612 9.762,36.796 12.471,36.796 12.767,36.5 v1(14.7,36.5)
NetR1_2: R1.2 U1.1 | length 2.5
  Top Layer w0.4: R1.2 U1.1 U1.1@6.9,64.25
NetR2_1: R2.1 U3.15 | length 42.3
  Top Layer w0.2: v1(9.05,61.85) v1(10.85,61.85) ; v1(14.225,37.25) 15.225,37.25 15.975,36.5 U3.15
  Top Layer w0.4: v1(2.25,62.65) R2.1@2.95,62.65
  Bottom Layer w0.2: v1(2.25,62.65) 3.05,61.85 v1(9.05,61.85) ; v1(10.85,61.85) 9.4,60.4 9.4,37.8 9.95,37.25 v1(14.225,37.25)
NetR2_2: R2.2 U1.2 | length 2.5
  Top Layer w0.4: R2.2 U1.2@6.9,62.85
NetR3_1: R3.1 R11.1 R13.1 U3.12 | length 41.1
  Top Layer w0.2: v1(15.15,35.625) 15.65,35.125 U3.12
  Top Layer w0.4: v1(2.25,59.05) R11.1 ; R13.1 R11.1 ; R3.1 R11.1
  Bottom Layer w0.2: v1(2.25,59.05) 8,59.05 8.492,58.558 8.492,37.424 9.574,36.342 12.283,36.342 13,35.625 v1(15.15,35.625)
NetR3_2: R3.2 U1.3 | length 2.5
  Top Layer w0.4: R3.2 U1.3@6.9,61.45
NetR4_1: R4.1 U1.22 | length 7.1
  Top Layer w0.4: v1(18.4,61.45) U1.22@19.1,61.45 ; v1(22.025,64.05) R4.1@22.725,64.05
  Bottom Layer w0.2: v1(18.4,61.45) 18.4,63.1 19.35,64.05 v1(22.025,64.05)
NetR4_2: R4.2 U3.13 | length 38.3
  Top Layer w0.2: U3.13 v1(20.85,35.5)
  Top Layer w0.4: R4.2@24.125,64.05 v1(24.825,64.05)
  Bottom Layer w0.2: v1(20.85,35.5) 21.275,35.925 21.275,37.9 20.075,39.1 20.075,51.45 20.8,52.175 22.538,52.175 22.8,52.437 22.8,53.325 23.1,53.625 24.7,53.625 25.475,54.4 25.475,63.4 v1(24.825,64.05)
NetR5_1: R5.1 U1.20 | length 2.8
  Top Layer w0.4: U1.20@19.9,58.45 R5.1@22.7,58.45
NetR5_2: R5.2 U3.26 | length 26.1
  Top Layer w0.2: U3.26@15.15,42.05 U3.26@15.15,42.075 ; U3.26@15.15,42.575 15.15,43.85 v1(15.65,44.35) ; v1(15.225,56.1) 15.7,56.1 16.35,55.45 v1(16.35,54.775)
  Top Layer w0.4: R5.2 v1(24.8,58.65)
  Bottom Layer w0.2: v1(15.225,56.1) 22.25,56.1 v1(24.8,58.65) ; v1(15.65,44.35) 16.35,45.05 v1(16.35,54.775)
NetR6_1: R6.1 U1.19 | length 2.8
  Top Layer w0.4: U1.19@19.9,57.25 R6.1
NetR6_2: R6.2 U3.28 | length 24.6
  Top Layer w0.2: U3.28@14.15,42.075 U3.28 14.15,45.325 v1(14.65,45.825)
  Top Layer w0.4: R6.2 v1(24.8,57.25)
  Bottom Layer w0.2: v1(14.65,45.825) 14.925,46.1 14.925,54.75 15.725,55.55 23.1,55.55 v1(24.8,57.25)
NetR8_1: R8.1 U1.18 | length 2.8
  Top Layer w0.4: U1.18@19.9,55.85 R8.1
NetR8_2: R8.2 U3.25 | length 21.7
  Top Layer w0.2: U3.25 15.65,43.1 v1(16.15,43.6)
  Top Layer w0.4: R8.2 v1(24.8,55.85)
  Bottom Layer w0.2: v1(16.15,43.6) 17.05,44.5 17.05,54.287 17.688,54.925 23.475,54.925 24.4,55.85 v1(24.8,55.85)
NetR9_1: R9.1 U1.17 | length 2.8
  Top Layer w0.4: U1.17@19.9,54.45 R9.1
NetR9_2: R9.2 R10.1 R12.1 U3.27 | length 25.9
  Top Layer w0.2: U3.27@14.65,42.075 U3.27 14.65,43.8 ; 14.65,43.3 14.65,44.575 v1(15.15,45.075) ; v1(15.625,54.025) v1(17.8,54.025) ; R12.1 R10.1 R9.2
  Top Layer w0.4: R9.2@24.1,54.65 v1(24.8,54.65)
  Bottom Layer w0.2: v1(15.15,45.075) 15.625,45.55 v1(15.625,54.025) ; v1(17.8,54.025) 18.225,54.45 24.025,54.45 24.225,54.65 v1(24.8,54.65)
NetR22_1: R22.1 U3.45 | length 34.6
  Top Layer w0.2: U3.45 9.775,37 10.9,38.125 v1(10.9,39.3)
  Top Layer w0.4: v1(22,61.275) R22.1@22.7,61.275
  Bottom Layer w0.2: v1(10.9,39.3) 11.3,39.3 13.346,41.346 13.346,46.388 14.017,47.059 14.017,57.381 15.165,58.529 21.029,58.529 21.25,58.75 21.25,60.525 v1(22,61.275)
NetR23_1: R23.1 U3.46 | length 33.9
  Top Layer w0.2: U3.46 10.254,36.5 11.6,37.846 v1(11.6,38.6)
  Top Layer w0.4: v1(22,59.85) R23.1@22.7,59.85
  Bottom Layer w0.2: v1(11.6,38.6) 11.6,38.958 13.8,41.158 13.8,46.2 14.471,46.871 14.471,57.193 15.353,58.075 21.459,58.075 22,58.616 v1(22,59.85)
NetR24_1: R24.1 U3.48 | length 18.3
  Top Layer w0.2: R24.1 1.35,46.65 1.2,46.5 1.2,37.425 1.475,37.15 6.2,37.15 7.85,35.5 U3.48
NetR30_1: R30.1 U3.39 | length 8.3
  Top Layer w0.2: R30.1@6.375,46.375 7.125,46.375 7.7,45.8 7.7,40.367 8.067,40 U3.39
NetR32_1: R32.1 U3.21 | length 14
  Top Layer w0.2: U3.21 18.084,39.5 18.576,39.008 22.392,39.008 23.1,38.3 23.1,31.9 23.4,31.6 R32.1
NetR33_1: R33.1 U3.20 | length 14.8
  Top Layer w0.2: U3.20 17.942,39 18.388,38.554 22.046,38.554 22.6,38 22.6,31.758 23.1,31.258 23.1,30.4 23.3,30.2 R33.1
NetR35_2: R35.2 U3.19 | length 15.5
  Top Layer w0.2: U3.19 17.8,38.5 18.2,38.1 21.8,38.1 22.1,37.8 22.1,31.616 22.646,31.07 22.646,30.212 23.1,29.758 23.1,29.1 23.4,28.8 R35.2
NetR36_2: R36.2 U3.7 | length 4.6
  Top Layer w0.2: U3.7 13.15,32.782 14.648,31.284 14.916,31.284 15.1,31.1 R36.2
NetR37_1: R37.1 SW1.1 | length 6.4
  Top Layer w0.2: SW1.1@16.5,22.8 R37.1
NetR37_2: R37.2 U3.8 | length 5.6
  Top Layer w0.2: U3.8 13.65,32.924 14.836,31.738 16.262,31.738 16.5,31.5 R37.2
NetR38_1: R38.1 SW1.4 | length 14.5
  Top Layer w0.2: SW1.4 19.4,17.46 19.654,17.714 19.654,23.546 17.9,25.3 R38.1
NetR38_2: R38.2 U3.9 | length 6.7
  Top Layer w0.2: U3.9@14.185,34.19 U3.9 14.15,33.066 15.024,32.192 17.608,32.192 17.9,31.9 R38.2
NetR39_1: R39.1 SW1.2 | length 21.1
  Top Layer w0.2: R39.1@19.6,28.9 R39.1 19.3,25.4 20.854,23.846 27.054,23.846 27.346,23.554 27.346,17.714 27.6,17.46 SW1.2
NetR39_2: R39.2 U3.10 | length 7.8
  Top Layer w0.2: U3.10@14.685,34.19 U3.10 14.65,33.208 15.212,32.646 18.954,32.646 19.3,32.3 R39.2
NetR40_1: R40.1 U3.24 | length 1.6
  Top Layer w0.2: U3.24 R40.1@18.5,41
NetR41_1: R41.1 SW1.8 | length 14.2
  Top Layer w0.2: R41.1 20.7,25.6 22,24.3 27.242,24.3 27.8,23.742 27.8,22.8 28.06,22.54 SW1.8
NetR41_2: R41.2 U3.11 | length 8.9
  Top Layer w0.2: U3.11 15.15,33.35 15.4,33.1 20.4,33.1 20.7,32.8 R41.2
usb1_n: D4.1 J1.2 R26.1 | length 5
  Top Layer w0.2: D4.1 R26.1 23.8,43 25.15,44.35 J1.2
usb1_p: D5.1 J1.3 R27.1 | length 4.7
  Top Layer w0.2: R27.1 D5.1 23.9,45.6 24.5,45 J1.3
usb2_n: R26.2 U3.33 | length 16.1
  Top Layer w0.2: U3.33 11.65,43.175 11.897,43.422 13.31,43.422 13.725,43.837 13.725,45.875 14.342,46.492 19.608,46.492 20.4,45.7 20.4,43.725 21.125,43 R26.2
usb2_p: R27.2 U3.34 | length 16.1
  Top Layer w0.2: U3.34 11.15,43.3 11.672,43.822 13.145,43.822 13.325,44.002 13.325,46.041 14.176,46.892 19.774,46.892 20.8,45.866 20.8,44.534 21.034,44.3 R27.2
pads on no net: U1.4 U1.9 U1.10 U1.11 U1.14 U1.15 U3.3 U3.16 U3.22 U3.23 U3.29 U3.30 U3.31 U3.32 U3.37 U3.38 U3.41 U3.47

## Polygon pours and split planes (outlines as drawn)
GND on Top Layer "GND_L01_P049" (solid, remove dead copper, shelved, pour order 49): 0.2,65.1 31.8,65.1 31.8,0.2 0.2,0.2
GND on Bottom Layer "GND_L02_P051" (solid, remove dead copper, shelved, pour order 51): 0.2,65.1 31.8,65.1 31.8,0.2 0.2,0.2
NetQ1_2 on Bottom Layer "NETQ1_2_L02_P050" (solid, shelved, pour order 50): 7.325,16.075 9.175,16.075 9.175,14.2 13.825,14.2 13.825,16.075 15.675,16.075 15.675,12.75 15.45,12.75 7.325,12.75

## Silkscreen, mask and mechanical layers (free items; w line width, h text height)
Top Overlay:
  text "JLINK" at 31.9,56.5 h1.5 r90
  text "L1" at 2.6,50.2 h1.5
  text "L2" at 4.4,50.2 h1.5
  text "USB" at 29.325,49.95 h1.5
  text "TX" at 11.425,45.925 h1.5
  text "RX" at 13.75,45.925 h1.5
  text "L0" at 19.15,44.1 h1.5 r90
  text "RESET" at 7.7,42.1 h1.5 r90
  text "ICSP" at 23.315,33.97 h1.5
  text "ADDR 0-3" at 17.1,25.8 h1.5
  text "BATT" at 4.6,22.9 h1.5
  text "USB" at 9.9,22.9 h1.5
  text "PWR" at 3.6,19.9 h1.5 r90
  text "ADDR 4" at 10.65,16.3 h1.5
  text "BATTERY" at 6.7,0.7 h1.5 r90
Top Solder:
  text "Anchor ver 1.0" at 3.325,7.35 h1.52 r90
  text "Boozeboys" at 29.95,6.725 h1.52 r90
  text "~LB~" at 19.825,1.225 h1.52
Outline:
  the board outline again, w0.25

## Text inside footprints (layer, text, board x,y; h text height)
D1: Assembly_TOP "K" at 12.6,47.875 h0.5 r270
D2: Assembly_TOP "K" at 14.6,47.875 h0.5 r270
D3: Assembly_TOP "K" at 3.575,47.875 h0.5 r270
D6: Assembly_TOP "K" at 5.075,47.875 h0.5 r270
D7: Assembly_TOP "K" at 17.2,45.625 h0.5 r90
J1: Place_TOP "PCB Edge" at 31.25,43.1 h1 r90
U2: Note_TOP "1" at 25.2,5.5 h1 r180